# Altium PCB 7805-2.PcbDoc
Units mil, origin at the board's own origin, x right, y up, seen from the top; angles counter-clockwise.
Board outline 1461 x 1262 mil, 2 copper layers (Top Layer, Bottom Layer); 8 components, 5 nets, 23 pads, 0 vias.
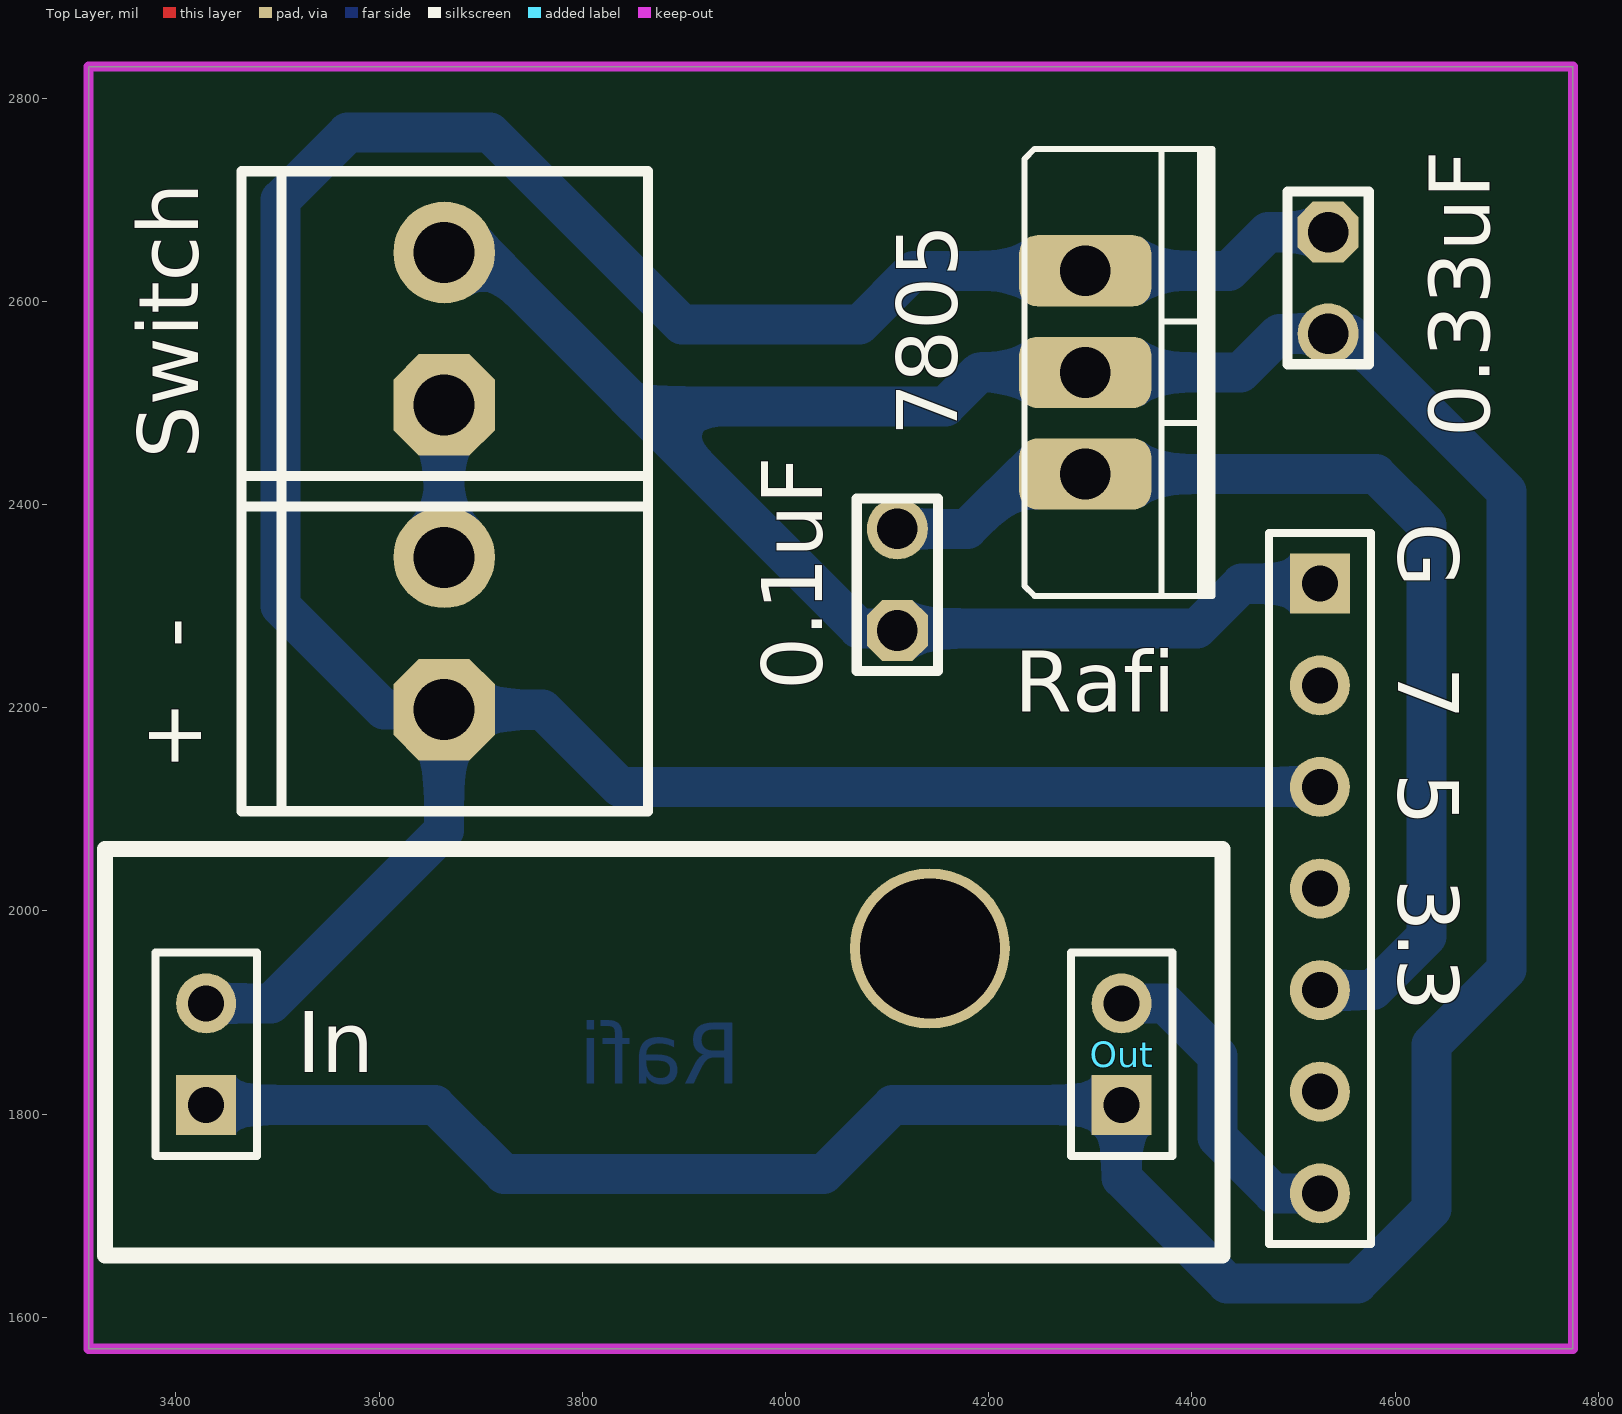
[diagram p0: Top Layer view]
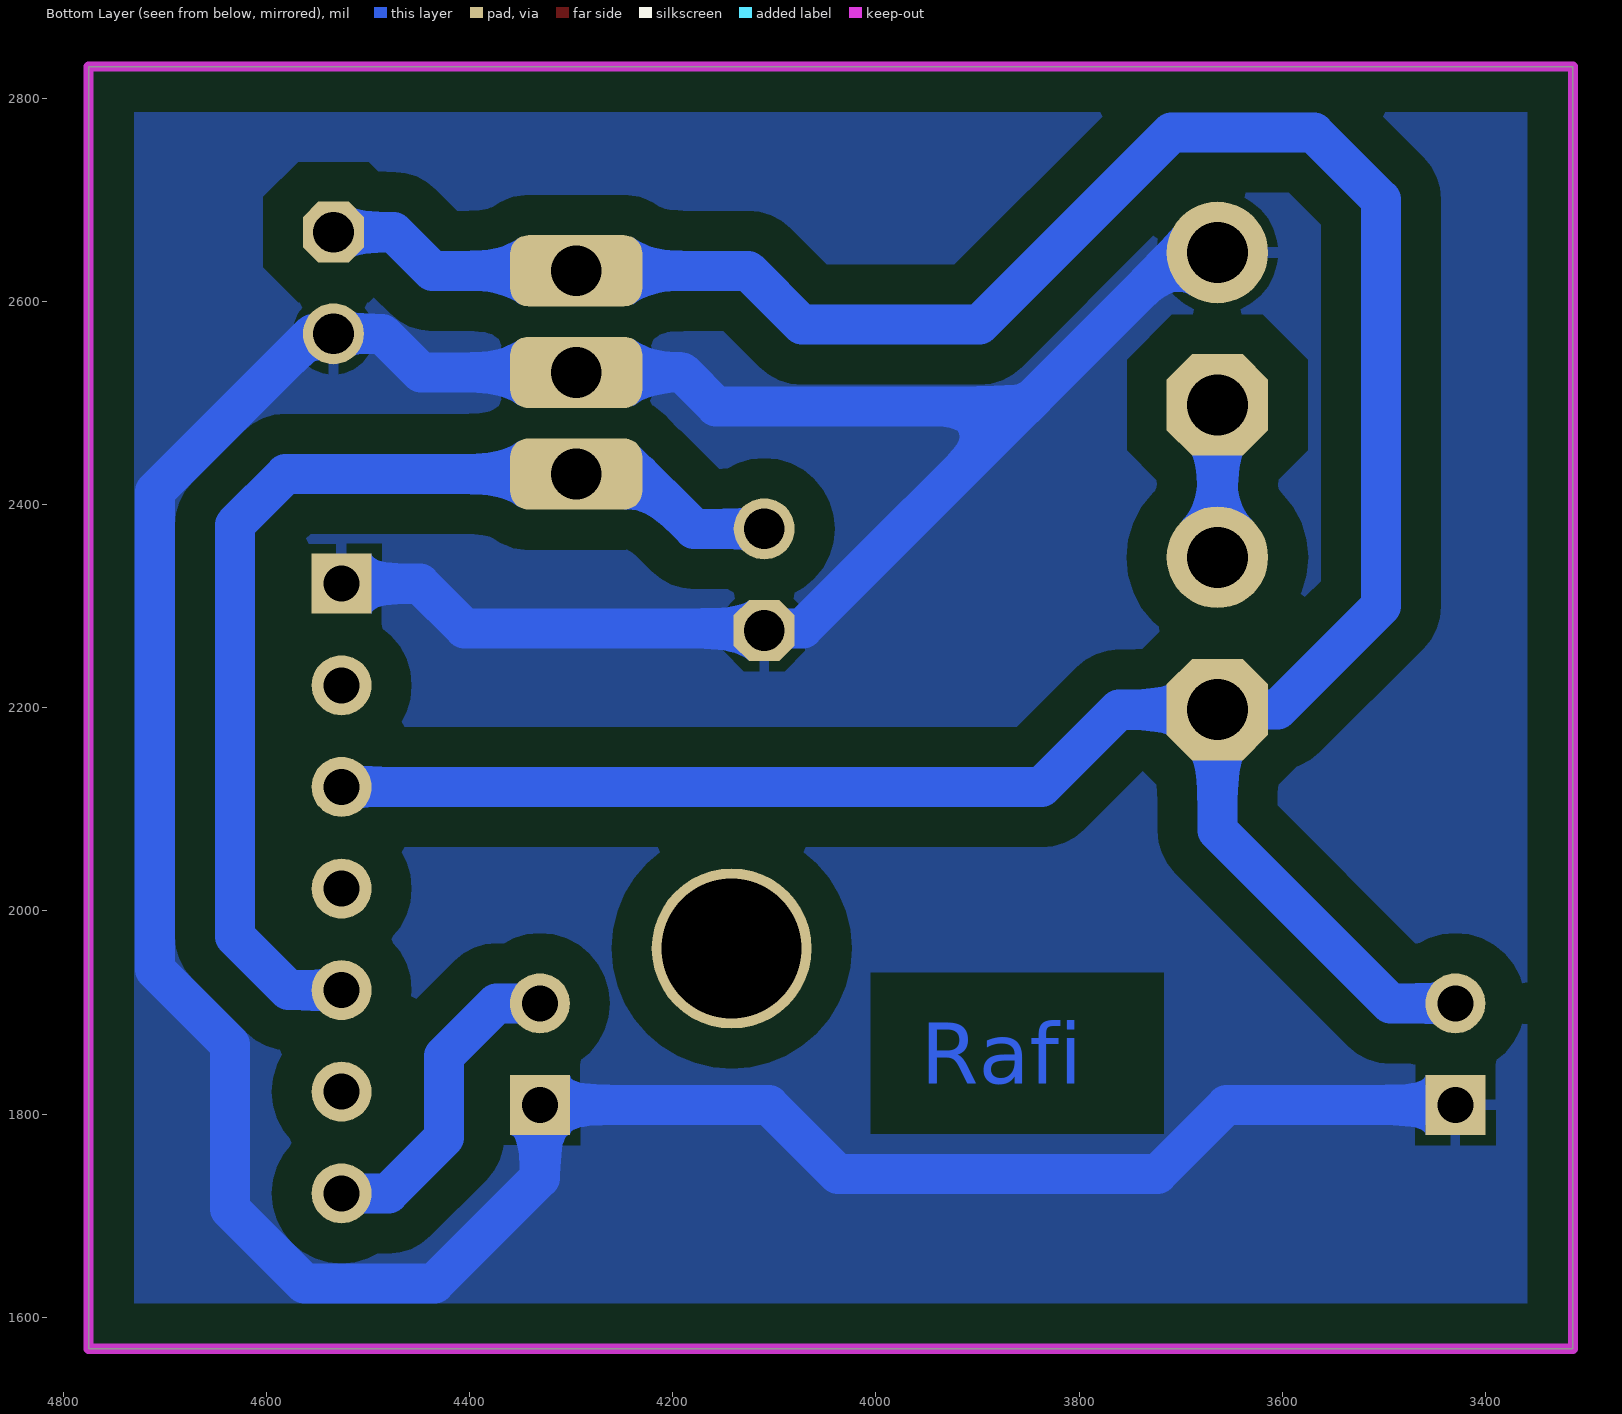
[diagram p1: Bottom Layer view, seen from below]

## Layer stack, top to bottom
Top Solder: solder mask 0.4, Solder Resist, Dk 3.5
Top Layer: signal copper 1.4
Dielectric 1: dielectric 12.6, FR-4, Dk 4.8
Bottom Layer: signal copper 1.4
Bottom Solder: solder mask 0.4, Solder Resist, Dk 3.5

## Board outline
3314,1569 3314,2831 4775,2831 4775,1569

## Design rules (kind name [scope] priority, off if disabled: settings)
Clearance [All] p1: gap=39.37
PolygonConnect [All] p1: connectstyle=Relief reliefconductorwidth=10 reliefentries=4 polygonreliefangle="90 Angle" airgapwidth=10
RoutingVias [All] p1: holewidth=28 width=50 viastyle="Through Hole" minholewidth=28 minwidth=50 maxholewidth=28 maxwidth=50
SolderMaskExpansion [All] p1: expansion=4
Width [All] p1: maxlimit=39.37 minlimit=39.37 preferedwidth=39.37
30 further rules are at their usual default settings.

## Components (designator, comment, footprint, x,y, rotation, side; value= is the part's Value field where it differs from the comment)
0.1uF "0.1uF" My_cap100n 4110,2326 r90 top
0.33uF "0.33uF" My_cap100n 4534,2618 r270 top
7805 "L7805" to220-123-v 4295,2630 r270 top (schematic designator U?)
"+  -" "Power Connector" "My_ Power_Connector" 3464,2048 r90 top (schematic designator Power)
"G   7  5  3.3" "Header 7" HDR1X7 4526,2322 r270 top (schematic designator P?)
In "Header 2" HDR1X2 3429.73,1808.95 r90 top
Out "Header 2" HDR1X2 4330.73,1808.95 r90 top
Switch "Power Connector" "My_ Power_Connector" 3464,2348 r90 top

## Footprints (in the part's own frame and the unit in brackets; to place one, negate y for a bottom-side part, rotate by r counter-clockwise, add the part's x,y. Pads: shape width x height; smd on the part's side, far side on the other; paste and mask are expansions set on the pad)
HDR1X2 [mm] "Connector; Header; 2 Position"
  rect 1.5x1.5 hole 0.9: 1(0,0)
  round 1.5 hole 0.9: 2(2.54,0)
  silkscreen extent -1.27,-1.27 3.81,1.27
HDR1X7 [mm] "Connector; Header; 7 Position"
  rect 1.5x1.5 hole 0.9: 1(0,0)
  round 1.5 hole 0.9: 2(2.54,0) 3(5.08,0) 4(7.62,0) 5(10.16,0) 6(12.7,0) 7(15.24,0)
  silkscreen extent -1.27,-1.27 16.51,1.27
"My_ Power_Connector" [mil]
  oct 100x100 hole 60: 1(150,-200)
  round 100 hole 60: 2(300,-200)
  silkscreen extent 50,-400 380,0
My_cap100n [mil]
  oct 60x60 hole 40: 1(-50,0)
  round 60 hole 40: 2(50,0)
  silkscreen extent -90,-40 80,40
to220-123-v [mil] "TO220 123 pin numbering Vertical mount"
  rrect50% 70x130 hole 50: 1(0,0) 2(100,0) 3(200,0)
  silkscreen extent -120,-60 320,125, body extent -121,-59 321,126, height 945

## Part data
0.1uF 0.33uF: library part "Cap ceramic", "CAP-100Nf"
7805: library part L7805-TO220, "LINEAR REGULATOR 5.0V"
"+  -" Switch: "white Power Connector"
"G   7  5  3.3": "Header, 7-Pin"
In Out: "Header, 2-Pin"

## Free pads (board coordinates)
  round 157.48 hole 137.8: 8(4142,1963)

## Nets (pads, with @x,y where several pads share a name; then routed paths per layer and width w, separated by ;. In a path a pad name is that pad's centre, name@x,y a point inside that pad or via, vN(x,y) a via of type N, cw(c..) or ccw(c..) an arc to the next point about the centre after c; other vN are vias at no path point)
+3.3: "G   7  5  3.3.7" Out.2 | length 319.7
  Bottom Layer w39.37: Out.2 4373.3,1908.95 4425,1857.26 4425,1777 4480,1722 4526,1722
+5: 0.1uF.2 7805.3 "G   7  5  3.3.5" | length 1096
  Bottom Layer w39.37: 0.1uF.2 4179,2376 4233,2430 7805.3 4581,2430 4631,2380 4631,1975 4578,1922 4526,1922
+7.4: 0.33uF.1 7805.1 "+  -.1" "G   7  5  3.3.3" In.2 | length 3094.6
  Bottom Layer w39.37: In.2 3493.73,1908.95 3664,2079.22 3664,2198 ; 4526,2122 3837,2122 3761,2198 3664,2198 ; 0.33uF.1 4474.64,2668 4436.64,2630 7805.1 4125.8,2630 4072.8,2577 3916.25,2577 3916.19,2577.05 3898.15,2577.05 3709.2,2766 3569,2766 3503,2700 3503,2300 3605,2198 3664,2198
GND: 0.1uF.1 0.33uF.2 7805.2 "G   7  5  3.3.1" In.1 Out.1 Switch.2 | length 4141.2
  Bottom Layer w39.37: In.1 3654.98,1808.95 3722.93,1741 4037.53,1741 4105.48,1808.95 Out.1 4330.73,1737.27 4434.58,1633.42 4562.69,1633.42 4636,1706.73 4636,1868.64 4709.74,1942.38 4709.74,2412.62 4554.36,2568 0.33uF.2 4486,2568 4448,2530 7805.2 4190.82,2530 4157.28,2496.46 3853.54,2496.46 3844,2506 ; Switch.2 3702,2648 3844,2506 ; 4526,2322 4449,2322 4405,2278 4072,2278 3844,2506
NetPower_2: "+  -.2" Switch.1 | length 150
  Bottom Layer w39.37: 3664,2348 Switch.1
pads on no net: "G   7  5  3.3.2" "G   7  5  3.3.4" "G   7  5  3.3.6"

## Polygon pours and split planes (outlines as drawn)
GND on Bottom Layer "Bottom Layer-GND" (solid, pour order 9): 3314,1569 4775,1569 4775,2831 3314,2831 3314,1569

## Keep-outs
Keep-Out Layer:
  the board outline again, w10

## Other copper
Bottom Layer:
  text "Rafi" at 3956,1830 h60

## Silkscreen, mask and mechanical layers (free items; w line width, h text height)
Top Overlay:
  lines w15.75: 3330.01,1661 3330.01,2061 4430,2061 4430,1661.01 3330.01,1661
  text "Rafi" at 4225,2196 h60